# Altium PCB 2_Smoke_detector.PcbDoc (part 1 of 5)
Units mil, origin at the board's own origin, x right, y up, seen from the top; angles counter-clockwise.
Board outline 3800 x 3790 mil, 4 copper layers (Top Layer, Layer 1, Layer 2, Bottom Layer), stack 23.756 mil thick; 122 components, 70 nets, 333 pads, 0 vias.
Unrouted connection lines stored in the file: 251.
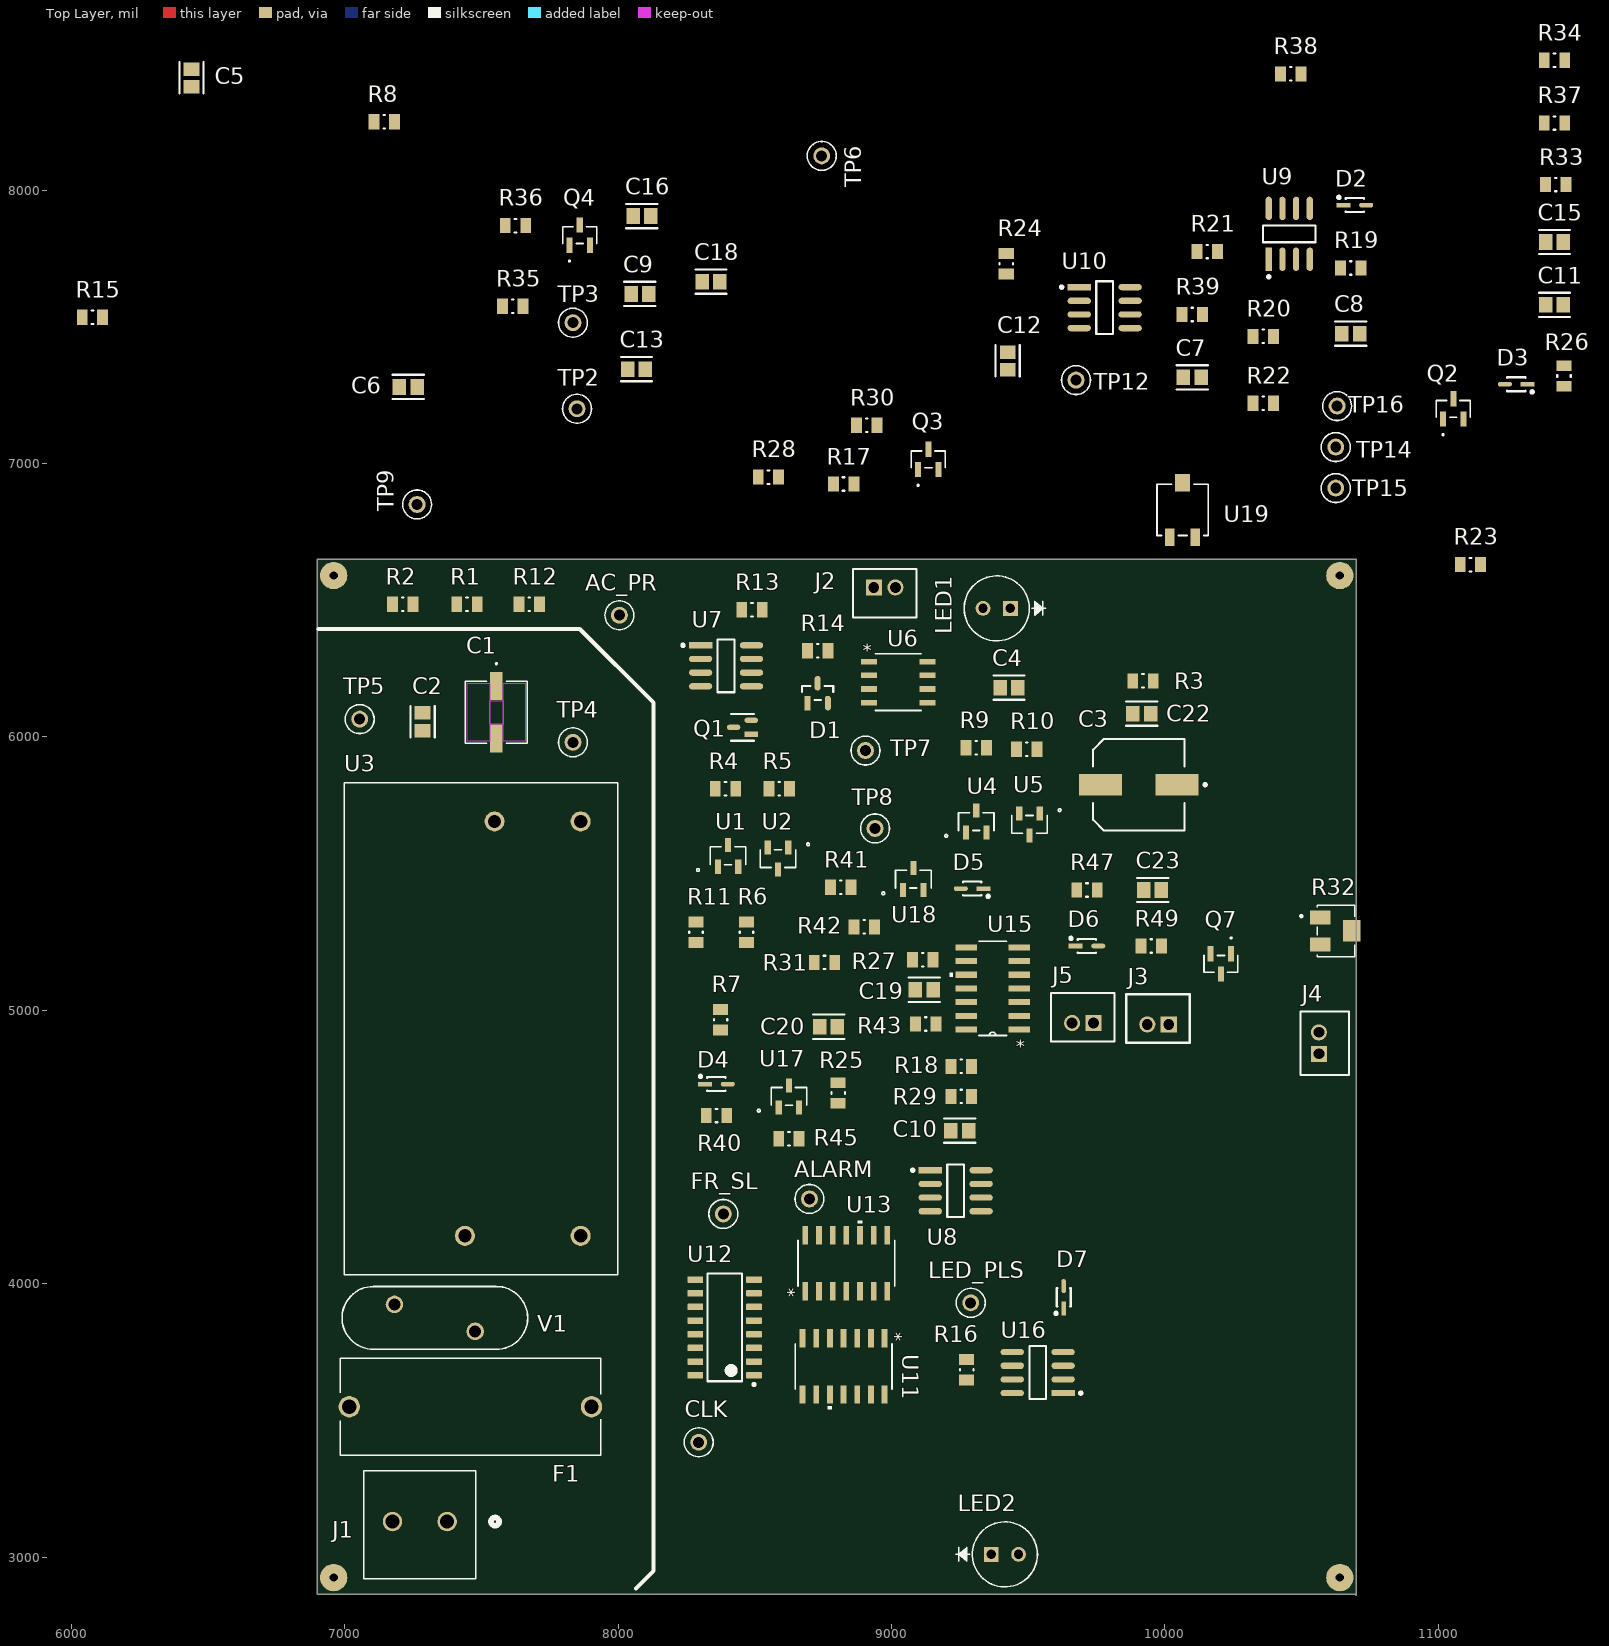
[diagram p0: Top Layer view]
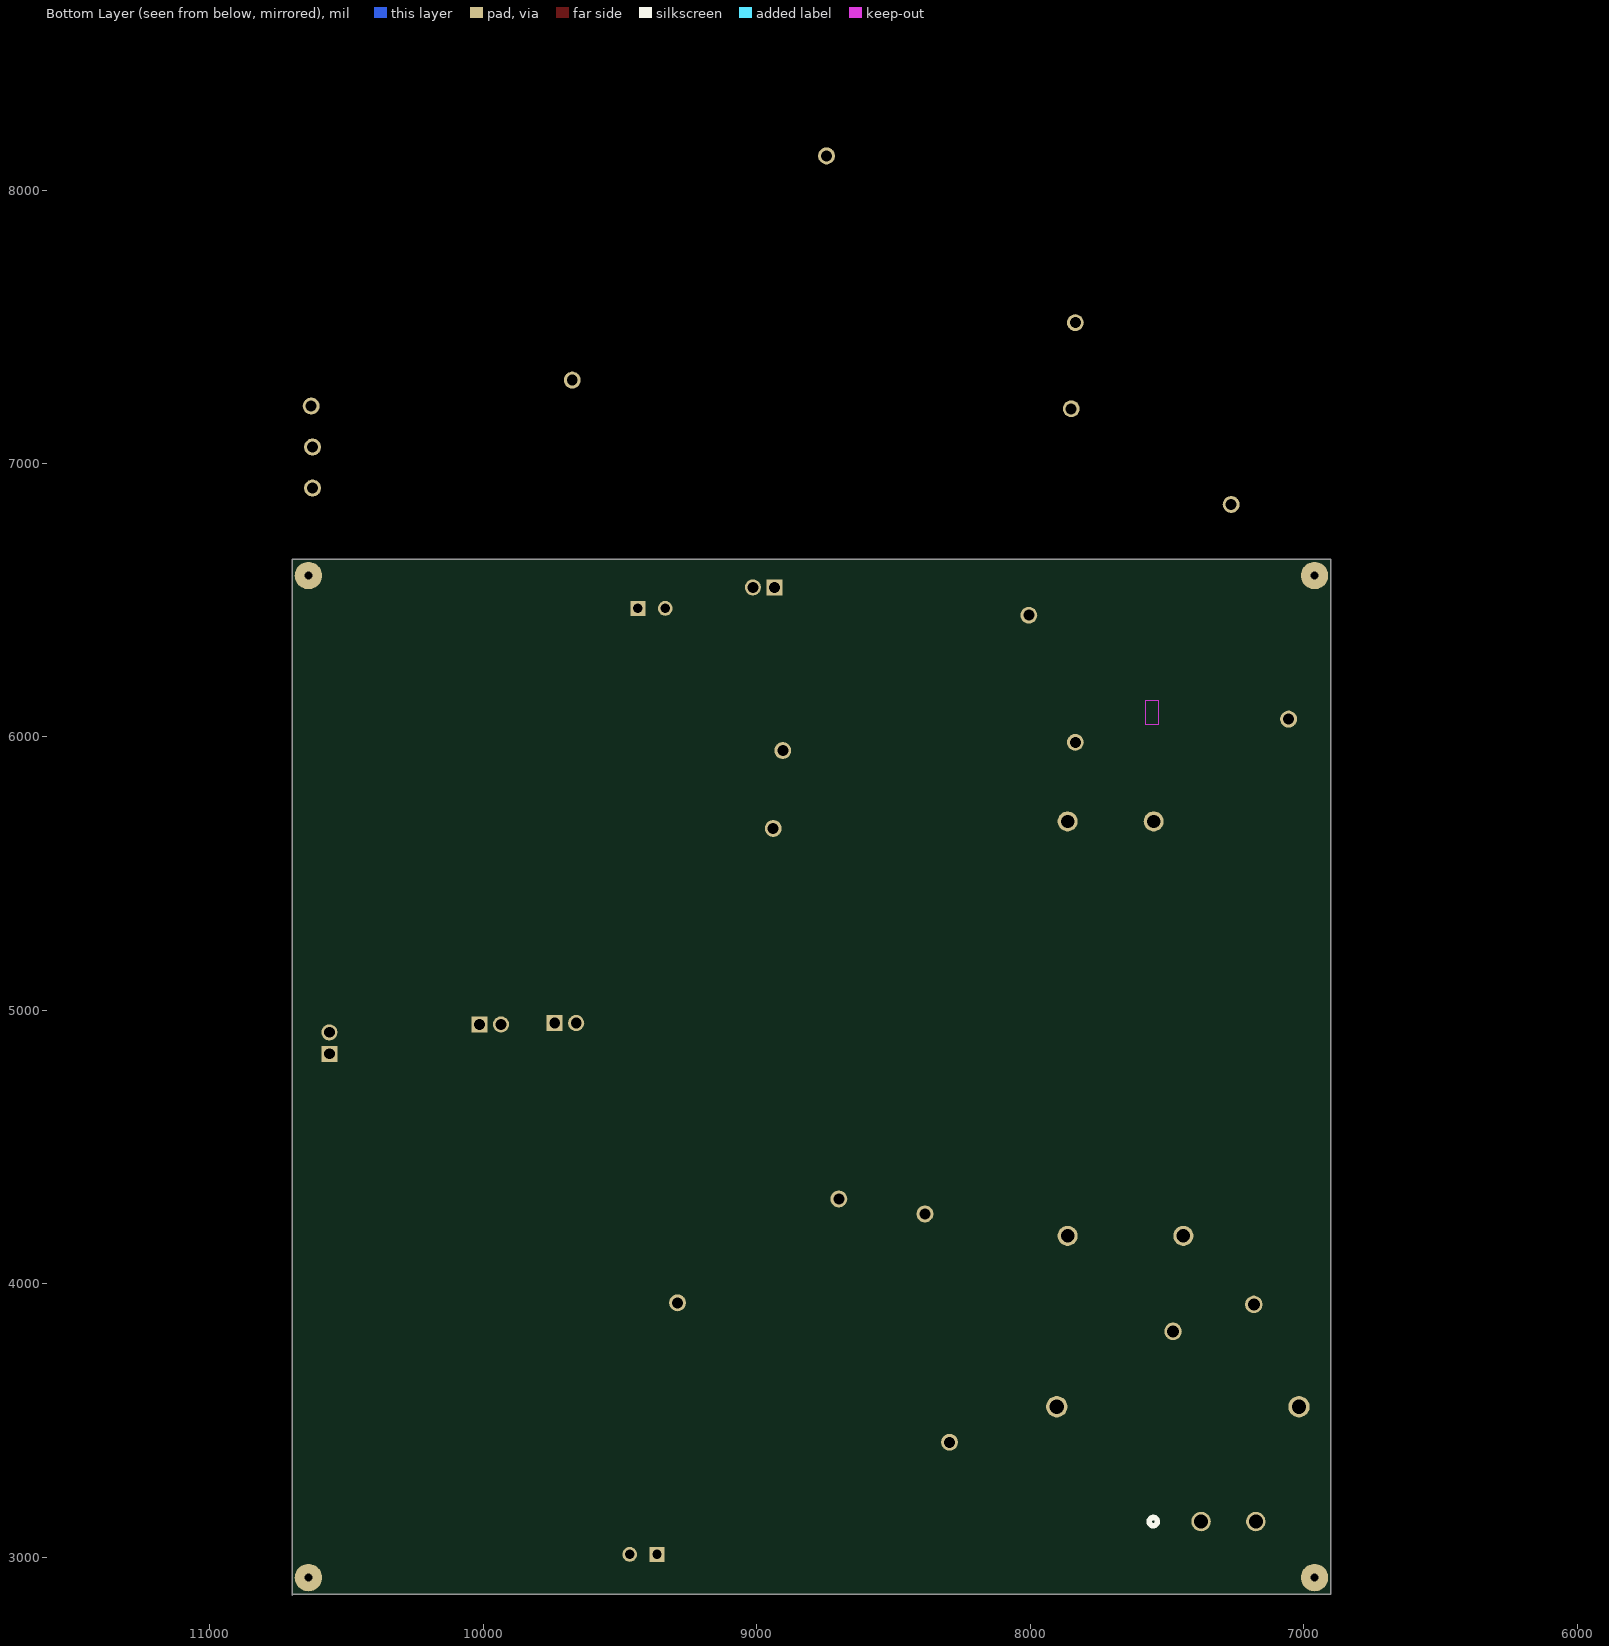
[diagram p1: Bottom Layer view, seen from below]

## Layer stack, top to bottom
Top Solder: solder mask 0.4, Solder Resist, Dk 3.5
Top Layer: signal copper 1.4
Dielectric 2: prepreg 2.8, PP-006, Dk 4.1
Layer 1: signal copper 1.378
Dielectric 1: dielectric 12.6, FR-4, Dk 4.8
Layer 2: signal copper 1.378
Dielectric 3: prepreg 2.8, PP-006, Dk 4.1
Bottom Layer: signal copper 1.4
Bottom Solder: solder mask 0.4, Solder Resist, Dk 3.5

## Board outline
6900,2865 10695,2865 10700,2860 10700,6650 6900,6650

## Design rules (kind name [scope] priority, off if disabled: settings)
BoardOutlineClearance [All] p1: gap=12 ignorepadtopadclearanceinfootprint=FALSE
Clearance [All] p1: gap=5 ignorepadtopadclearanceinfootprint=FALSE
HoleSize [All] p1: absolutevalues=TRUE maxlimit=100 minlimit=12 maxpercent=80.000 minpercent=20.000
PolygonConnect [All] p1: connectstyle=Relief reliefconductorwidth=10 reliefentries=4 polygonreliefangle="90 Angle" airgapwidth=10
RoutingVias [All] p1: holewidth=28 width=50 viastyle="Through Hole" minholewidth=12 minwidth=24 maxholewidth=28 maxwidth=50
SilkToSolderMaskClearance [IsPad] p1: minsilkscreentomaskgap=6 clearancetoexposedcopper=TRUE
SolderMaskExpansion [All] p1: expansion=2 istentingtop=FALSE
SupplyNets "Schematic Supply Nets" [InNet('GND')] p1: voltage=0.000
Width [All] p1: maxlimit=10 minlimit=5 preferedwidth=10
28 further rules are at their usual default settings.

## Components (designator, comment, footprint, x,y, rotation, side; value= is the part's Value field where it differs from the comment)
AC_PR "Test Point" FP-5004-MFG 8005,6445 r0 top (schematic designator TP11)
ALARM "Test Point" FP-5004-MFG 8700,4310 r90 top (schematic designator TP17)
C1 "100u" CAP_100u 7555,6090 r270 top
C2 "0.1u" 0805_CER_CAP 7285,6055 r90 top
C3 "470u" Radial_SMD_CAP 9905,5825 r180 top value=470µF
C4 "0.22u" 0805_CER_CAP 9430,6180 r0 top value=220nF
C5 "47u" 0805_CER_CAP 6440,8410 r270 top value=47µF
C6 "47u" 0805_CER_CAP 7232.51,7280 r0 top value=47µF
C7 "5pF" 0805_CER_CAP 10100,7315 r0 top
C8 "0.1u" 0805_CER_CAP 10680,7475 r0 top
C9 "1uF" 0805_CER_CAP 8080,7620 r180 top value=1µF
C10 "1uF" 0805_CER_CAP 9250,4560 r0 top value=1µF
C11 "1nF" 0805_CER_CAP 11425,7580 r0 top
C12 "100nF" 0805_CER_CAP 9425,7375 r90 top
C13 "10pF" 0805_CER_CAP 8067.51,7345 r0 top
C15 "100nF" 0805_CER_CAP 11425,7810 r0 top
C16 "100nF" 0805_CER_CAP 8087.51,7905 r180 top
C18 "100nF" 0805_CER_CAP 8340,7665 r180 top
C19 "100nF" 0805_CER_CAP 9120,5075 r0 top
C20 "10uF" 0805_CER_CAP 8770,4940 r180 top value=10µF
C22 "100nF" 0805_CER_CAP 9915,6085 r180 top
C23 "100nF" 0805_CER_CAP 9955,5440 r0 top
CLK "Test Point" FP-5004-MFG 8295,3420 r90 top (schematic designator TP13)
D1 "3V3 ZENER" FP-SOT23-IPC_B_ZENER 8730,6160 r90 top
D2 "DIODE" FP-477AB-IPC_B 10695,7945 r0 top value=4pF
D3 "DIODE" FP-477AB-IPC_B 11285,7290 r180 top value=4pF
D4 "DIODE" FP-477AB-IPC_B 8360,4730 r0 top value=4pF
D5 "DIODE" FP-477AB-IPC_B 9295,5445 r180 top value=4pF
D6 "DIODE" FP-477AB-IPC_B 9715,5235 r0 top value=4pF
D7 "DIODE" FP-477AB-IPC_B 9630,3950 r90 top value=4pF
F1 "FUSE" FUSE_4628 7460,3550 r0 top
FR_SL "Test Point" FP-5004-MFG 8385,4255 r90 top (schematic designator TP10)
J1 "CONN" CONN_1715721_PXC 7375,3130 r180 top
J2 "B2B-PH-K-S(LF)(SN)" JST 8975,6525 r0 top
J3 "B2B-PH-K-S(LF)(SN)" JST 9975,4970 r180 top
J4 "B2B-PH-K-S(LF)(SN)" JST 10585,4880 r90 top
J5 "B2B-PH-K-S(LF)(SN)" JST 9700,4975 r180 top
LED1 "LED YELLOW" LED_C503B-RCN-030C503B-ACN-030_CRW 9435,6470 r180 top
LED2 "LED RED" LED_C503B-RCN-030C503B-ACN-030_CRW 9365,3010 r0 top
LED_PLS "Test Point" FP-5004-MFG 9290,3930 r0 top (schematic designator TP1)
Q1 "NPN" FP-SOT323-IPC_B 8455,6035 r180 top
Q2 "N-MOSFET" SOT23_TOS 11055,7200 r0 top
Q3 "N-MOSFET" SOT23_TOS 9135,7015 r0 top
Q4 "N-MOSFET" SOT23_TOS 7860,7835 r0 top
Q7 "N-MOSFET" SOT23_TOS 10205,5170 r180 top
R1 "28.7kΩ" 0805_RES 7447.44,6485 r180 top
R2 "10kΩ" 0805_RES 7212.44,6485 r180 top
R3 "100kΩ" 0805_RES 9920,6205 r180 top
R4 "100kΩ" 0805_RES 8392.86,5810.39 r0 top
R5 "100kΩ" 0805_RES 8590,5810 r0 top
R6 "330kΩ" 0805_RES 8470,5285 r270 top
R7 "100kΩ" 0805_RES 8375,4965 r270 top
R8 "1kΩ" 0805_RES 7145,8250 r0 top
R9 "1kΩ" 0805_RES 9310,5960 r0 top
R10 "100kΩ" 0805_RES 9495,5955 r180 top
R11 "10kΩ" 0805_RES 8285,5285 r90 top
R12 "10MΩ" 0805_RES 7675,6485 r180 top
R13 "2.7kΩ" 0805_RES 8490,6465 r180 top
R14 "100kΩ" 0805_RES 8730,6315 r0 top
R15 "62kΩ" 0805_RES 6077.56,7535 r0 top
R16 "10kΩ" 0805_RES 9275,3685 r90 top
R17 "33Ω" 0805_RES 8825,6925 r180 top
R18 "4.7kΩ" 0805_RES 9255,4795 r180 top
R19 "100Ω" 0805_RES 10680,7715 r0 top
R20 "10kΩ" 0805_RES 10360,7465 r0 top
R21 "499kΩ" 0805_RES 10155,7775 r0 top
R22 "10kΩ" 0805_RES 10360,7220 r0 top
R23 "1MΩ" 0805_RES 11117.56,6630 r0 top
R24 "10kΩ" 0805_RES 9420,7730 r90 top
R25 "220kΩ" 0805_RES 8805,4697.44 r270 top
R26 "22kΩ" 0805_RES 11460,7320 r90 top
R27 "10kΩ" 0805_RES 9115,5185 r0 top
R28 "10Ω" 0805_RES 8550,6950 r0 top
R29 "1.2kΩ" 0805_RES 9255,4685 r0 top
R30 "1.2kΩ" 0805_RES 8910,7140 r0 top
R31 "10kΩ" 0805_RES 8755,5175 r0 top
R32 "3224W1103E" TRIM_3224W1103E 10626.14,5290.49 r0 top
R33 "10kΩ" 0805_RES 11430,8020 r0 top
R34 "8.2kΩ" 0805_RES 11425,8475 r0 top
R35 "100Ω" 0805_RES 7615,7575 r180 top
R36 "1MΩ" 0805_RES 7625,7870 r180 top
R37 "10kΩ" 0805_RES 11425,8245 r0 top
R38 "470Ω" 0805_RES 10460,8425 r0 top
R39 "10MΩ" 0805_RES 10100,7545 r0 top
R40 "1kΩ" 0805_RES 8360,4615 r0 top
R41 "100Ω" 0805_RES 8815,5450 r180 top
R42 "1MΩ" 0805_RES 8900,5305 r0 top
R43 "1MΩ" 0805_RES 9125,4950 r0 top
R45 "1MΩ" 0805_RES 8625,4530 r180 top
R47 "1kΩ" 0805_RES 9715,5440 r0 top
R49 "1MΩ" 0805_RES 9950,5235 r180 top
TP2 "Test Point" FP-5004-MFG 7850,7200 r0 top
TP3 "Test Point" FP-5004-MFG 7835,7515 r0 top
TP4 "Test Point" FP-5004-MFG 7835,5980 r0 top
TP5 "Test Point" FP-5004-MFG 7055,6065 r0 top
TP6 "Test Point" FP-5004-MFG 8745,8125 r0 top
TP7 "Test Point" FP-5004-MFG 8905,5950 r0 top
TP8 "Test Point" FP-5004-MFG 8940,5665 r0 top
TP9 "Test Point" FP-5004-MFG 7265,6850 r0 top
TP12 "Test Point" FP-5004-MFG 9675,7305 r90 top
TP14 "Test Point" FP-5004-MFG 10625,7060 r90 top
TP15 "Test Point" FP-5004-MFG 10625,6910 r90 top
TP16 "Test Point" FP-5004-MFG 10630,7210 r90 top
U1 "SI2301CDS-T1-GE3" TO-236_VIS 8402.4,5565 r0 top
U2 "SI2301CDS-T1-GE3" TO-236_VIS 8585,5555 r180 top
U3 "AC/DC CONVERTER" CONV_IRM-05-5 7499.06,4932.87 r90 top
U4 "SI2301CDS-T1-GE3" TO-236_VIS 9310,5690 r0 top
U5 "SI2301CDS-T1-GE3" TO-236_VIS 9505,5680 r180 top
U6 "REG" SO-8_S_LIT 9025,6200 r0 top
U7 "OP AMP" IC_TLV9062_8_SOIC 8395,6260 r0 top
U8 "OP AMP" IC_TLV9062_8_SOIC 9235,4340 r0 top
U9 "OP AMP" IC_TLV9062_8_SOIC 10455,7840 r90 top
U10 "OP AMP" IC_TLV9062_8_SOIC 9780,7570 r0 top
U11 "XOR GATE" SOT108-1_NXP 8825,3697.5 r270 top
U12 "COUNTER" D0016A_N 8390,3840 r180 top
U13 "NOR GATE" SOT108-1_NXP 8835,4075 r90 top
U15 "TLC555" D14 9370,5080 r180 top
U16 "OP AMP" IC_TLV9062_8_SOIC 9535,3675 r180 top
U17 "SI2301CDS-T1-GE3" TO-236_VIS 8625,4685 r0 top
U18 "SI2301CDS-T1-GE3" TO-236_VIS 9080,5480 r0 top
U19 "3314G-1-503E" 3314G_BRN-M 10065,6830 r0 top
V1 "Varistor" LA_14MM_LOW_LTF 7330,3875 r0 top

## Footprints (in the part's own frame and the unit in brackets; to place one, negate y for a bottom-side part, rotate by r counter-clockwise, add the part's x,y. Pads: shape width x height; smd on the part's side, far side on the other; paste and mask are expansions set on the pad)
0805_CER_CAP [mil] "0805 CER CAP"
  rect 49.4x57.33 smd paste+0 mask+0: 1(-32.51,0) 2(32.51,0)
  silkscreen extent -57,-44 57,44, body extent -67,-39 67,39, height 10
0805_RES [mil]
  rect 39.63x55.44 smd paste+0 mask+0: 1(-37.44,0) 2(37.44,0)
  silkscreen extent -3,-25 3,25, body extent -67,-38 67,38, height 10
3314G_BRN-M [mil]
  rect 35x65 smd paste+0 mask+0: 1(46.5,-99.5) 3(-46.5,-99.5)
  rect 55x65 smd paste+0 mask+0: 2(0,99.5)
  silkscreen extent -94,-94 94,94, body extent -98,-122 98,122, height 105
CAP_100u [mil] "EEE-FT1C101AR"
  rect 102.75x45.75 smd paste+0 mask+0: 1(-96.31,0) 2(96.31,0)
  Top Layer keep-out region: -42.94,-24.87 -42.94,24.87 42.94,24.87 42.94,-24.87
  Top Layer keep-out region: -106.5,24.87 -106.5,106.5 106.5,106.5 106.5,24.87
  Top Layer keep-out region: -106.5,-106.5 -106.5,-24.87 106.5,-24.87 106.5,-106.5
  Keep-Out Layer region: -42.94,-24.87 -42.94,24.87 42.94,24.87 42.94,-24.87
  silkscreen extent -181,-114 114,114, body extent -128,-109 128,109, height 242
CONN_1715721_PXC [mil]
  round 71 / inner round 60 / far side round 71 hole 51 paste-99999 mask+0: 1(0,0) 2(200,0)
  silkscreen extent -190,-186 305,210, body extent -125,-184 297,204, height 559
CONV_IRM-05-5 [mm]
  round 1.86 hole 1.24: AC/L(-19.25,-9.25) AC/N(-19.25,1.5) VNEG(19.25,-9.25) VPOS(19.25,-1.25)
  silkscreen extent -22.85,-12.7 22.85,12.7, body extent -22.73,-12.95 22.97,12.45, height 20.51
D14 [mil]
  rect 78x22 smd paste-39 mask-39: 1(-97,150) 2(-97,100) 3(-97,50) 4(-97,0) 5(-97,-50) 6(-97,-100) 7(-97,-150) 8(97,-150) 9(97,-100) 10(97,-50) 11(97,0) 12(97,50) 13(97,100) 14(97,150)
  silkscreen extent -51,-172 156,172, body extent -122,-172 122,172, height 69
D0016A_N [mm] "SOIC, 16-Leads, Body 10x4mm, Pitch 1.27mm, IPC Medium Density"
  rrect17% 1.45x0.6 smd: 1(-2.725,4.445) 2(-2.725,3.175) 3(-2.725,1.905) 4(-2.725,0.635) 5(-2.725,-0.635) 6(-2.725,-1.905) 7(-2.725,-3.175) 8(-2.725,-4.445) 9(2.725,-4.445) 10(2.725,-3.175) 11(2.725,-1.905) 12(2.725,-0.635) 13(2.725,0.635) 14(2.725,1.905) 15(2.725,3.175) 16(2.725,4.445)
  silkscreen extent -2.85,-5 1.6,5.42, body extent -3,-4.95 3,4.95, height 1.59
FP-477AB-IPC_B [mil]
  rect 51.4x17.03 smd paste+0 mask+0: 1(-41.35,0)
  rrect100% 51.4x17.03 smd paste+0 mask+0: 2(41.35,0)
  silkscreen extent -63,-26 33,33, body extent -77,-34 77,34, height 10
FP-5004-MFG [mm]
  round 1.57 hole 1.02 paste-2539.97 mask+0: 1(0,0)
  silkscreen extent -1.35,-1.34 1.35,1.34, body extent -1.45,-1.45 1.45,1.45, height 0.25
FP-SOT23-IPC_B_ZENER [mm]
  rect 1.355x0.562 smd paste+0 mask+0: 1(-0.925,0.95)
  rrect100% 1.355x0.562 smd paste+0 mask+0: 2(-0.925,-0.95) 3(0.925,0)
  silkscreen extent -0.65,-1.45 0.65,1.45, body extent -1.85,-1.7 1.85,1.7, height 0.25
FP-SOT323-IPC_B [mm]
  rect 1.259x0.482 smd paste+0 mask+0: 1(-0.827,0.65)
  rrect100% 1.259x0.482 smd paste+0 mask+0: 2(-0.827,-0.65) 3(0.827,0)
  silkscreen extent -1.05,-1.25 1.05,1.25, body extent -1.71,-1.25 1.71,1.25, height 0.25
FUSE_4628 [mm]
  round 1.98 hole 1.32: 1(-11.25,0) 2(11.25,0)
  silkscreen extent -12.1,-4.49 12.1,4.49, body extent -12.1,-4.5 12.1,4.5, height 11.99
IC_TLV9062_8_SOIC [mil]
  rect 85.4x22.92 smd paste+0 mask+0: 1(-93.06,75)
  rrect100% 85.4x22.92 smd paste+0 mask+0: 2(-93.06,25) 3(-93.06,-25) 4(-93.06,-75) 5(93.06,-75) 6(93.06,-25) 7(93.06,25) 8(93.06,75)
  silkscreen extent -162,-97 31,97, body extent -146,-106 146,106, height 10
JST [mm] "Connector, 2-Leads, Body 5.9x4.5mm, Pitch 2mm"
  rect 1.5x1.5 hole 1: 1(-1,0.55)
  round 1.5 hole 1: 2(1,0.55)
  silkscreen extent -2.95,-2.25 2.95,2.25, body extent -2.95,-2.25 2.95,2.25, height 6
LA_14MM_LOW_LTF [mil] "Varistor_MOV"
  round 64 / inner round 60 / far side round 64 hole 44 paste-99999 mask+0: 1(-147.64,49.21) 2(147.64,-49.21)
  silkscreen extent -339,-115 340,115, body extent -334,-107 334,90, height 732
LED_C503B-RCN-030C503B-ACN-030_CRW [mil]
  rect 54x54 / inner round 60 / far side rect 54x54 hole 34 paste-99999 mask+0: 1(0,0)
  round 54 / inner round 60 / far side round 54 hole 34 paste-99999 mask+0: 2(100,0)
  silkscreen extent -129,-119 169,119, body extent -64,-114 164,114, height 399
Radial_SMD_CAP [mm]
  rect 4x2 smd paste+0 mask+0: 1(-3.55,0) 2(3.55,0)
  silkscreen extent -6.28,-4.25 4.25,4.25, body extent -5.8,-4.5 5.8,4.5, height 0.25
SO-8_S_LIT [mil]
  rect 57.28x20.97 smd paste+0 mask+0: 1(-107.14,75) 2(-107.14,25) 3(-107.14,-25) 4(-107.14,-75) 5(107.14,-75) 6(107.14,-25) 7(107.14,25) 8(107.14,75)
  silkscreen extent -84,-104 84,104, body extent -122,-99 122,99, height 69
SOT23_TOS [mil]
  rect 22.36x55.56 smd paste+0 mask+0: 1(-37.4,-37) 2(37.4,-37) 3(0,37)
  silkscreen extent -62,-98 62,30, body extent -57,-51 57,51, height 43
SOT108-1_NXP [mil]
  rect 67x21 smd paste+0 mask+0: 1(-102.5,150) 2(-102.5,100) 3(-102.5,50) 4(-102.5,0) 5(-102.5,-50) 6(-102.5,-100) 7(-102.5,-150) 8(102.5,-150) 9(102.5,-100) 10(102.5,-50) 11(102.5,0) 12(102.5,50) 13(102.5,100) 14(102.5,150)
  silkscreen extent -84,-177 156,177, body extent -122,-172 122,172, height 69
TO-236_VIS [mil] "SOT23_Si2301CDS"
  rect 22.36x51.56 smd paste+0 mask+0: 1(-37.4,-40) 2(37.4,-40) 3(0,40)
  silkscreen extent -115,-57 65,32, body extent -60,-52 60,52, height 44
TRIM_3224W1103E [mm]
  rect 1.9x1.3 smd: 1(-1.45,1.25) 3(-1.45,-1.25)
  rect 1.6x2 smd: 2(1.45,0)
  silkscreen extent -3.32,-2.4 1.75,2.4, body extent -1.95,-2.4 1.95,2.4, height 5.3

## Part data
AC_PR ALARM CLK FR_SL LED_PLS TP2 TP3 TP4 TP5 TP6 TP7 TP8 TP9 TP12 TP14 TP15 TP16: library part 5004, "PCB TEST POINT", LCSC Part Number=C2906762, Manufacturer=Keystone, Automotive=No, Category=Conn, ComponentLink2Description=Datasheet, ComponentLink2URL=https://www.keyelco.com/product-pdf.cfm?p=1313, Contact Material=Silver, Device Class L1=Connectors, Device Class L2=unset, Device Class L3=unset, Digikey Description="PC TEST POINT MINIATURE YELLOW", Height=4.72mm, Is Female=yes, Lead Free=Yes, Manufacturer Part Number=5004, Mouser Description="TEST POINT PC MINI .040\"D YELLOW", Number of Contacts=1, Octopart=https://octopart.com/5004-keystone-28591, Package=5004, RoHS=TRUE
C1: library part EEEFT1C101AR, "CAP ALUM 100uF 20% 16V SMD", Capacitance=100uF, Case/Package=Radial, ESR (Equivalent Series Resistance)=360mR, LCSC Part Number=C336792, Leakage Current=16uA, Max Operating Temperature=105°C, Min Operating Temperature=-55°C, Package Quantity=1000, Ripple Current=240mA, Tolerance=20%, Voltage=16V, Construction=Cylindrical, Contact Plating=Tin, Diameter=5mm, Height=5.8mm, Height - Seated (Max)=0.24inch, Lead Diameter=0.65mm, Lead Pitch=1.5mm, Length=5.8mm, Life (Hours)=2000Hour, Mount="Surface Mount", Packaging="Tape and Reel", Radiation Hardening=No, REACH SVHC="No SVHC", Ripple Current (AC)=240mA, RoHS Compliant=Yes, Series=FT, Termination=SMD/SMT, Voltage Rating=16V, Voltage Rating (DC)=16V
C2 C8: library part CL21B104KBCNNNC, "CAP CER 0.1uF 50V X7R 0805", Capacitance=100nF, Case Code (Imperial)=0805, Case Code (Metric)=2012, Dielectric=X7R, LCSC Part Number=C1711, Max Operating Temperature=125°C, Min Operating Temperature=-55°C, Tolerance=10%, Voltage=50V, Case/Package=0805, Contact Plating=Tin, Depth=1.25mm, Height=0.85mm, Lead Free="Lead Free", Length=2mm, Material=Ceramic, Mount="Surface Mount", Packaging="Tape and Reel", Radiation Hardening=No, Thickness=0.037inch, Voltage Rating=50V, Voltage Rating (DC)=50V, Width=0.049inch
C3: library part EEEFK1A471P, "CAP ALUM 470uF ±20% 10V SMD", Case/Package=3333, Dielectric Material=Aluminium, ESR (Equivalent Series Resistance)=160mΩ, LCSC Part Number=C178530, Leakage Current=47µA, Manufacturer=Panasonic, Manufacturer Lifecycle Status=ACTIVE, Max Operating Temperature=105°C, Min Operating Temperature=-55°C, Ratings=AEC-Q200, Ripple Current=600mA, Supplier Part Number=EEE-FK1A471P, Tolerance=20%, Voltage=10V, Category="Aluminum Electrolytic Capacitors", ComponentLink1Description=https://datasheet.octopart.com:443/EEEFK1A471P-Panasonic-datasheet-169278531.pdf?src-supplier=IHS, ComponentLink1URL=https://datasheet.octopart.com:443/EEEFK1A471P-Panasonic-datasheet-169278531.pdf?src-supplier=IHS, ComponentLink2Description=https://datasheet.octopart.com:443/EEEFK1A471P-Panasonic-datasheet-62287436.pdf?src-supplier=Future+Electronics, ComponentLink2URL=https://datasheet.octopart.com:443/EEEFK1A471P-Panasonic-datasheet-62287436.pdf?src-supplier=Future+Electronics, ComponentLink3Description=https://datasheet.octopart.com:443/EEEFK1A471P-Panasonic-datasheet-8854493.pdf?src-supplier=Future+Electronics, ComponentLink3URL=https://datasheet.octopart.com:443/EEEFK1A471P-Panasonic-datasheet-8854493.pdf?src-supplier=Future+Electronics, ComponentLink4Description=https://datasheet.octopart.com:443/EEEFK1A471P-Panasonic-datasheet-8711795.pdf?src-supplier=Future+Electronics, ComponentLink4URL=https://datasheet.octopart.com:443/EEEFK1A471P-Panasonic-datasheet-8711795.pdf?src-supplier=Future+Electronics, ComponentLink5Description=https://datasheet.octopart.com:443/EEEFK1A471P-Panasonic-datasheet-5313801.pdf?src-supplier=Future+Electronics, ComponentLink5URL=https://datasheet.octopart.com:443/EEEFK1A471P-Panasonic-datasheet-5313801.pdf?src-supplier=Future+Electronics, ComponentLink6Description=https://datasheet.octopart.com:443/EEEFK1A471P-Panasonic-datasheet-61627622.pdf?src-supplier=Newark, ComponentLink6URL=https://datasheet.octopart.com:443/EEEFK1A471P-Panasonic-datasheet-61627622.pdf?src-supplier=Newark, ComponentLink7Description=https://datasheet.octopart.com:443/EEEFK1A471P-Panasonic-datasheet-8161.pdf?src-supplier=Newark, ComponentLink7URL=https://datasheet.octopart.com:443/EEEFK1A471P-Panasonic-datasheet-8161.pdf?src-supplier=Newark, ComponentLink8Description=https://datasheet.octopart.com:443/EEEFK1A471P-Panasonic-datasheet-8852369.pdf?src-supplier=Newark, ComponentLink8URL=https://datasheet.octopart.com:443/EEEFK1A471P-Panasonic-datasheet-8852369.pdf?src-supplier=Newark, ComponentLink9Description=https://datasheet.octopart.com:443/EEEFK1A471P-Panasonic-datasheet-8712906.pdf?src-supplier=Newark, ComponentLink9URL=https://datasheet.octopart.com:443/EEEFK1A471P-Panasonic-datasheet-8712906.pdf?src-supplier=Newark, ComponentLink10Description=https://datasheet.octopart.com:443/EEEFK1A471P-Panasonic-datasheet-13278598.pdf?src-supplier=Newark, ComponentLink10URL=https://datasheet.octopart.com:443/EEEFK1A471P-Panasonic-datasheet-13278598.pdf?src-supplier=Newark, ComponentLink11Description=https://datasheet.octopart.com:443/EEE-FK1A471P-Panasonic-datasheet-159140467.pdf?src-supplier=Newark, ComponentLink11URL=https://datasheet.octopart.com:443/EEE-FK1A471P-Panasonic-datasheet-159140467.pdf?src-supplier=Newark, ComponentLink12Description=https://datasheet.octopart.com:443/EEE-FK1A471P-Panasonic-datasheet-22087609.pdf?src-supplier=Newark, ComponentLink12URL=https://datasheet.octopart.com:443/EEE-FK1A471P-Panasonic-datasheet-22087609.pdf?src-supplier=Newark, ComponentLink13Description=https://datasheet.octopart.com:443/EEE-FK1A471P-Panasonic-datasheet-150469824.pdf?src-supplier=JRH+Electronics, ComponentLink13URL=https://datasheet.octopart.com:443/EEE-FK1A471P-Panasonic-datasheet-150469824.pdf?src-supplier=JRH+Electronics, ComponentLink14Description=https://datasheet.octopart.com:443/EEEFK1A471P-Panasonic-datasheet-13266987.pdf?src-supplier=RS+(Formerly+Allied+Electronics), ComponentLink14URL=https://datasheet.octopart.com:443/EEEFK1A471P-Panasonic-datasheet-13266987.pdf?src-supplier=RS+(Formerly+Allied+Electronics), ComponentLink15Description=https://datasheet.octopart.com:443/EEE-FK1A471P-Panasonic-datasheet-11546739.pdf?src-supplier=Electro+Sonic, ComponentLink15URL=https://datasheet.octopart.com:443/EEE-FK1A471P-Panasonic-datasheet-11546739.pdf?src-supplier=Electro+Sonic, ComponentLink16Description=https://sigma.octopart.com:443/150570760/technical_drawing/Panasonic-EEEFK1A471P.pdf?src-supplier=Panasonic+SCT, ComponentLink16URL=https://sigma.octopart.com:443/150570760/technical_drawing/Panasonic-EEEFK1A471P.pdf?src-supplier=Panasonic+SCT, ComponentLink17Description=https://datasheet.octopart.com:443/EEEFK1A471P-Panasonic-datasheet-136531309.pdf?src-supplier=TME, ComponentLink17URL=https://datasheet.octopart.com:443/EEEFK1A471P-Panasonic-datasheet-136531309.pdf?src-supplier=TME, ComponentLink18Description=https://datasheet.octopart.com:443/EEEFK1A471P-Panasonic-datasheet-136348055.pdf?src-supplier=TME, ComponentLink18URL=https://datasheet.octopart.com:443/EEEFK1A471P-Panasonic-datasheet-136348055.pdf?src-supplier=TME, ComponentLink19Description=https://datasheet.octopart.com:443/EEEFK1A471P-Panasonic-datasheet-7555708.pdf?src-supplier=Farnell, ComponentLink19URL=https://datasheet.octopart.com:443/EEEFK1A471P-Panasonic-datasheet-7555708.pdf?src-supplier=Farnell, ComponentLink20Description=https://datasheet.octopart.com:443/EEEFK1A471P-Panasonic-datasheet-5318435.pdf?src-supplier=Farnell, ComponentLink20URL=https://datasheet.octopart.com:443/EEEFK1A471P-Panasonic-datasheet-5318435.pdf?src-supplier=Farnell, ComponentLink21Description=https://datasheet.octopart.com:443/EEEFK1A471P-Panasonic-datasheet-5316599.pdf?src-supplier=Farnell, ComponentLink21URL=https://datasheet.octopart.com:443/EEEFK1A471P-Panasonic-datasheet-5316599.pdf?src-supplier=Farnell, ComponentLink22Description=https://datasheet.octopart.com:443/EEEFK1A471P-Panasonic-datasheet-5390910.pdf?src-supplier=Farnell, ComponentLink22URL=https://datasheet.octopart.com:443/EEEFK1A471P-Panasonic-datasheet-5390910.pdf?src-supplier=Farnell, ComponentLink23Description=https://datasheet.octopart.com:443/EEEFK1A471P-Panasonic-datasheet-7550061.pdf?src-supplier=Farnell, ComponentLink23URL=https://datasheet.octopart.com:443/EEEFK1A471P-Panasonic-datasheet-7550061.pdf?src-supplier=Farnell, ComponentLink24Description=https://datasheet.octopart.com:443/EEEFK1A471P-Panasonic-datasheet-1770.pdf?src-supplier=Farnell, ComponentLink24URL=https://datasheet.octopart.com:443/EEEFK1A471P-Panasonic-datasheet-1770.pdf?src-supplier=Farnell, ComponentLink25Description=https://datasheet.octopart.com:443/EEEFK1A471P-Panasonic-datasheet-1290.pdf?src-supplier=Farnell, ComponentLink25URL=https://datasheet.octopart.com:443/EEEFK1A471P-Panasonic-datasheet-1290.pdf?src-supplier=Farnell, ComponentLink26Description=https://datasheet.octopart.com:443/EEEFK1A471P-Panasonic-datasheet-2601.pdf?src-supplier=Farnell, ComponentLink26URL=https://datasheet.octopart.com:443/EEEFK1A471P-Panasonic-datasheet-2601.pdf?src-supplier=Farnell, ComponentLink27Description=https://datasheet.octopart.com:443/EEEFK1A471P-Panasonic-datasheet-122249.pdf?src-supplier=Farnell, ComponentLink27URL=https://datasheet.octopart.com:443/EEEFK1A471P-Panasonic-datasheet-122249.pdf?src-supplier=Farnell, ComponentLink28Description=https://datasheet.octopart.com:443/EEEFK1A471P-Panasonic-datasheet-4056.pdf?src-supplier=Farnell, ComponentLink28URL=https://datasheet.octopart.com:443/EEEFK1A471P-Panasonic-datasheet-4056.pdf?src-supplier=Farnell, Country of Origin="Japan, Malaysia", Diameter=8mm, Dissipation Factor=19%, Export Control Classification Number (ECCN) Code=EAR99, Harmonized Tariff Schedule (HTS) Code=8532.22.00.20, Height=10.2mm, Height - Seated (Max)=10.2108mm, Impedance=160mΩ, Introduction Date=2004-08-25, Lead Free="Lead Free", Length=10.2mm, Life (Hours)=2000hours, Lifecycle Status=Production, Manufacturer Part Number=EEEFK1A471P, Mounting Technology="Surface Mount", Number of Terminals=2, Packaging="Cut Tape", Part Series=FK, Pins=2, Pricing="500=0.28647, 1000=0.27558, 2000=0.26534, 4000=0.25696, 8000=0.24826 (USD)", Radiation Hardening=No, REACH SVHC=Unaffected, Ripple Current (AC)=600mA, RoHS=Compliant, Schedule B="8532220020, 8532220020|8532220020|8532220020|8532220020|8532220020", Stock=4000, Supplier=Avnet, Termination=SMD/SMT, Voltage Rating=10V, Voltage Rating (AC)=10V, Voltage Rating (DC)=10V, Width=8.3mm
C4: library part CC0805KRX7R6BB224, "CAP CER 0.22uF 10V X7R 0805", Case Code (Imperial)=0805, Case Code (Metric)=2012, Dielectric=X7R, Dielectric Material=Ceramic, Insulation Resistance=10GΩ, LCSC Part Number=C520019, Manufacturer="Yageo Group", Manufacturer Package Identifier=CC0805-0.85, Max Operating Temperature=125°C, Min Operating Temperature=-55°C, Supplier Part Number=311-4309-1-ND, Tolerance=10%, Voltage Rating=10V, Case/Package=0805, Category="Ceramic Capacitors", China RoHS=Compliant, ComponentLink1Description=https://datasheet.octopart.com:443/CC0805KRX7R6BB224-Yageo-datasheet-177165144.pdf?src-supplier=IHS, ComponentLink1URL=https://datasheet.octopart.com:443/CC0805KRX7R6BB224-Yageo-datasheet-177165144.pdf?src-supplier=IHS, ComponentLink2Description=https://datasheet.octopart.com:443/CC0805KRX7R6BB224-Yageo-datasheet-78855689.pdf?src-supplier=Upverter, ComponentLink2URL=https://datasheet.octopart.com:443/CC0805KRX7R6BB224-Yageo-datasheet-78855689.pdf?src-supplier=Upverter, ComponentLink3Description=https://datasheet.octopart.com/CC0805KRX7R6BB224-Yageo-datasheet-10883670.pdf, ComponentLink3URL=https://datasheet.octopart.com/CC0805KRX7R6BB224-Yageo-datasheet-10883670.pdf, ComponentLink4Description=https://datasheet.octopart.com:443/CC0805KRX7R6BB224-Yageo-Group-datasheet-184163374.pdf?src-supplier=LCSC, ComponentLink4URL=https://datasheet.octopart.com:443/CC0805KRX7R6BB224-Yageo-Group-datasheet-184163374.pdf?src-supplier=LCSC, ComponentLink5Description=https://datasheet.octopart.com:443/CC0805KRX7R6BB224-Yageo-datasheet-166511530.pdf?src-supplier=Future+Electronics, ComponentLink5URL=https://datasheet.octopart.com:443/CC0805KRX7R6BB224-Yageo-datasheet-166511530.pdf?src-supplier=Future+Electronics, ComponentLink6Description=https://datasheet.octopart.com:443/CC0805KRX7R6BB224-Yageo-datasheet-137700082.pdf?src-supplier=Future+Electronics, ComponentLink6URL=https://datasheet.octopart.com:443/CC0805KRX7R6BB224-Yageo-datasheet-137700082.pdf?src-supplier=Future+Electronics, ComponentLink7Description=https://datasheet.octopart.com:443/CC0805KRX7R6BB224-Yageo-datasheet-137700084.pdf?src-supplier=Future+Electronics, ComponentLink7URL=https://datasheet.octopart.com:443/CC0805KRX7R6BB224-Yageo-datasheet-137700084.pdf?src-supplier=Future+Electronics, ComponentLink8Description=https://datasheet.octopart.com:443/CC0805KRX7R6BB224-Yageo-datasheet-27626582.pdf?src-supplier=Future+Electronics, ComponentLink8URL=https://datasheet.octopart.com:443/CC0805KRX7R6BB224-Yageo-datasheet-27626582.pdf?src-supplier=Future+Electronics, ComponentLink9Description=https://datasheet.octopart.com:443/CC0805KRX7R6BB224-Yageo-datasheet-15895757.pdf?src-supplier=Future+Electronics, ComponentLink9URL=https://datasheet.octopart.com:443/CC0805KRX7R6BB224-Yageo-datasheet-15895757.pdf?src-supplier=Future+Electronics, ComponentLink10Description=https://datasheet.octopart.com:443/CC0805KRX7R6BB224-Yageo-datasheet-12526321.pdf?src-supplier=Future+Electronics, ComponentLink10URL=https://datasheet.octopart.com:443/CC0805KRX7R6BB224-Yageo-datasheet-12526321.pdf?src-supplier=Future+Electronics, ComponentLink11Description=https://datasheet.octopart.com:443/CC0805KRX7R6BB224-Yageo-Group-datasheet-165992755.pdf?src-supplier=ODG+(Origin+Data+Global), ComponentLink11URL=https://datasheet.octopart.com:443/CC0805KRX7R6BB224-Yageo-Group-datasheet-165992755.pdf?src-supplier=ODG+(Origin+Data+Global), ComponentLink12Description=http://sigma.octopart.com:80/conflict_mineral_statement/Yageo-company-3.pdf?src-supplier=Compliance+Statements, ComponentLink12URL=http://sigma.octopart.com:80/conflict_mineral_statement/Yageo-company-3.pdf?src-supplier=Compliance+Statements, ComponentLink13Description=http://sigma.octopart.com:80/rohs_statement/Yageo-company-2.pdf?src-supplier=Compliance+Statements, ComponentLink13URL=http://sigma.octopart.com:80/rohs_statement/Yageo-company-2.pdf?src-supplier=Compliance+Statements, Composition=Ceramic, Country of Origin="Mainland China, Taiwan", Depth=1.25mm, Dissipation Factor=5%, Export Control Classification Number (ECCN) Code=EAR99, Halogen Free="Halogen Free", Harmonized Tariff Schedule (HTS) Code=8532.24.00.20, Height=850µm, Introduction Date=2011-01-31, Lead Free="Lead Free", Length=2mm, Lifecycle Status=Production, Manufacturer Part Number=CC0805KRX7R6BB224, Material=Ceramic, Mounting Technology="Surface Mount", Number of Terminals=2, Packaging="Tape and Reel", Pricing="1=0.19, 10=0.109, 50=0.0768, 100=0.0669, 500=0.05016 (USD)", REACH SVHC=Unaffected, RoHS=Compliant, Stock=33422, Supplier=DigiKey, Termination=SMD/SMT, Thickness=939.8µm, Voltage Rating (DC)=10V, Weight=5.499807mg, Width=1.25mm
C5 C6: library part GRM21BR61A476ME15L, "CAP CER 47uF 10V X5R 0805", Case Code (Imperial)=0805, Case Code (Metric)=2012, Dielectric=X5R, Dielectric Material=Ceramic, LCSC Part Number=C124129, Manufacturer=Murata, Manufacturer Lifecycle Status="IN PRODUCTION", Max Operating Temperature=85°C, Min Operating Temperature=-55°C, Tolerance=20%, Voltage=10V, Case/Package=0805, Category="Ceramic Capacitors", ComponentLink1Description=https://datasheet.octopart.com:443/GRM21BR61A476ME15L-Murata-datasheet-22122223.pdf?src-supplier=Upverter, ComponentLink1URL=https://datasheet.octopart.com:443/GRM21BR61A476ME15L-Murata-datasheet-22122223.pdf?src-supplier=Upverter, ComponentLink2Description=https://datasheet.octopart.com:443/GRM21BR61A476ME15L-Murata-datasheet-66077109.pdf?src-supplier=element14+APAC, ComponentLink2URL=https://datasheet.octopart.com:443/GRM21BR61A476ME15L-Murata-datasheet-66077109.pdf?src-supplier=element14+APAC, ComponentLink3Description=https://datasheet.octopart.com:443/GRM21BR61A476ME15L-Murata-datasheet-141278181.pdf?src-supplier=Geoflip, ComponentLink3URL=https://datasheet.octopart.com:443/GRM21BR61A476ME15L-Murata-datasheet-141278181.pdf?src-supplier=Geoflip, ComponentLink4Description=https://datasheet.octopart.com:443/GRM21BR61A476ME15L-Murata-datasheet-165579666.pdf?src-supplier=TME, ComponentLink4URL=https://datasheet.octopart.com:443/GRM21BR61A476ME15L-Murata-datasheet-165579666.pdf?src-supplier=TME, ComponentLink5Description=https://datasheet.octopart.com:443/GRM21BR61A476ME15L-Murata-datasheet-59876780.pdf?src-supplier=TME, ComponentLink5URL=https://datasheet.octopart.com:443/GRM21BR61A476ME15L-Murata-datasheet-59876780.pdf?src-supplier=TME, ComponentLink6Description=https://datasheet.octopart.com:443/GRM21BR61A476ME15L-Murata-datasheet-140707527.pdf?src-supplier=Ciiva, ComponentLink6URL=https://datasheet.octopart.com:443/GRM21BR61A476ME15L-Murata-datasheet-140707527.pdf?src-supplier=Ciiva, ComponentLink7Description=https://datasheet.octopart.com:443/GRM21BR61A476ME15L-Murata-datasheet-138744839.pdf?src-supplier=Ciiva, ComponentLink7URL=https://datasheet.octopart.com:443/GRM21BR61A476ME15L-Murata-datasheet-138744839.pdf?src-supplier=Ciiva, ComponentLink8Description=https://datasheet.octopart.com/GRM21BR61A476ME15L-Murata-datasheet-12515295.pdf, ComponentLink8URL=https://datasheet.octopart.com/GRM21BR61A476ME15L-Murata-datasheet-12515295.pdf, ComponentLink9Description=https://datasheet.octopart.com/GRM21BR61A476ME15L-Murata-datasheet-12510076.pdf, ComponentLink9URL=https://datasheet.octopart.com/GRM21BR61A476ME15L-Murata-datasheet-12510076.pdf, ComponentLink10Description=https://datasheet.octopart.com/GRM21BR61A476ME15L-Murata-datasheet-11978611.pdf, ComponentLink10URL=https://datasheet.octopart.com/GRM21BR61A476ME15L-Murata-datasheet-11978611.pdf, ComponentLink11Description=https://datasheet.octopart.com/GRM21BR61A476ME15L-Murata-datasheet-10025737.pdf, ComponentLink11URL=https://datasheet.octopart.com/GRM21BR61A476ME15L-Murata-datasheet-10025737.pdf, ComponentLink12Description=https://datasheet.octopart.com/GRM21BR61A476ME15L-Murata-datasheet-8819587.pdf, ComponentLink12URL=https://datasheet.octopart.com/GRM21BR61A476ME15L-Murata-datasheet-8819587.pdf, ComponentLink13Description=http://sigma.octopart.com:80/reach_statement/Murata-company-16.pdf?src-supplier=Compliance+Statements, ComponentLink13URL=http://sigma.octopart.com:80/reach_statement/Murata-company-16.pdf?src-supplier=Compliance+Statements, Country of Origin=Philippines, Depth=1.25mm, Dissipation Factor=0.035%, Export Control Classification Number (ECCN) Code=EAR99, Harmonized Tariff Schedule (HTS) Code=8532.24.00.20, Height=1.25mm, Introduction Date=2013-11-20, Lead Free="Lead Free", Length=2mm, Lifecycle Status=Production, Manufacturer Part Number=GRM21BR61A476ME15L, Material=Ceramic, Mounting Technology="Surface Mount", Number of Terminals=2, Packaging="Cut Tape", Pricing="3000=0.715 (USD)", REACH SVHC=Unaffected, RoHS=Compliant, Schedule B="8532240020, 8532240020|8532240020, 8532240020|8532240020|8532240020, 8532240020|8532240020|8532240020|8532240020", Stock=548000, Supplier="Future Electronics", Supplier Part Number=GRM21BR61A476ME15L, Termination=SMD/SMT, Thickness=1.25mm, Voltage Rating=10V, Voltage Rating (DC)=10V, Width=1.25mm
C7: library part CC0805CRNPO9BN5R0, "CAP CER 5pF 50V NP0 0805", Case Code (Imperial)=0805, Case Code (Metric)=2012, Dielectric=C0G, Dielectric Material=Ceramic, LCSC Part Number=C519940, Manufacturer="Yageo Group", Max Operating Temperature=125°C, Min Operating Temperature=-55°C, Voltage Rating=50V, Case/Package=0805, Category="Ceramic Capacitors", China RoHS=Compliant, ComponentLink1Description=https://datasheet.octopart.com:443/CC0805CRNPO9BN5R0-Yageo-datasheet-137875056.pdf?src-supplier=IHS, ComponentLink1URL=https://datasheet.octopart.com:443/CC0805CRNPO9BN5R0-Yageo-datasheet-137875056.pdf?src-supplier=IHS, ComponentLink2Description=https://datasheet.octopart.com:443/CC0805CRNPO9BN5R0-Yageo-Group-datasheet-192360829.pdf?src-supplier=Future+Electronics, ComponentLink2URL=https://datasheet.octopart.com:443/CC0805CRNPO9BN5R0-Yageo-Group-datasheet-192360829.pdf?src-supplier=Future+Electronics, ComponentLink3Description=https://datasheet.octopart.com:443/CC0805CRNPO9BN5R0-Yageo-datasheet-137700082.pdf?src-supplier=Future+Electronics, ComponentLink3URL=https://datasheet.octopart.com:443/CC0805CRNPO9BN5R0-Yageo-datasheet-137700082.pdf?src-supplier=Future+Electronics, ComponentLink4Description=https://datasheet.octopart.com:443/CC0805CRNPO9BN5R0-Yageo-datasheet-78855684.pdf?src-supplier=Future+Electronics, ComponentLink4URL=https://datasheet.octopart.com:443/CC0805CRNPO9BN5R0-Yageo-datasheet-78855684.pdf?src-supplier=Future+Electronics, ComponentLink5Description=https://datasheet.octopart.com:443/CC0805CRNPO9BN5R0-Yageo-datasheet-24578986.pdf?src-supplier=Future+Electronics, ComponentLink5URL=https://datasheet.octopart.com:443/CC0805CRNPO9BN5R0-Yageo-datasheet-24578986.pdf?src-supplier=Future+Electronics, ComponentLink6Description=https://datasheet.octopart.com:443/CC0805CRNPO9BN5R0-Yageo-datasheet-16730043.pdf?src-supplier=Future+Electronics, ComponentLink6URL=https://datasheet.octopart.com:443/CC0805CRNPO9BN5R0-Yageo-datasheet-16730043.pdf?src-supplier=Future+Electronics, ComponentLink7Description=https://datasheet.octopart.com:443/CC0805CRNPO9BN5R0-Yageo-datasheet-12589826.pdf?src-supplier=Future+Electronics, ComponentLink7URL=https://datasheet.octopart.com:443/CC0805CRNPO9BN5R0-Yageo-datasheet-12589826.pdf?src-supplier=Future+Electronics, ComponentLink8Description=https://datasheet.octopart.com:443/CC0805CRNPO9BN5R0-Yageo-datasheet-182878260.pdf?src-supplier=Farnell, ComponentLink8URL=https://datasheet.octopart.com:443/CC0805CRNPO9BN5R0-Yageo-datasheet-182878260.pdf?src-supplier=Farnell, ComponentLink9Description=https://datasheet.octopart.com:443/CC0805CRNPO9BN5R0-Yageo-datasheet-151948684.pdf?src-supplier=Newark, ComponentLink9URL=https://datasheet.octopart.com:443/CC0805CRNPO9BN5R0-Yageo-datasheet-151948684.pdf?src-supplier=Newark, ComponentLink10Description=https://datasheet.octopart.com:443/CC0805CRNPO9BN5R0-Yageo-datasheet-10406438.pdf?src-supplier=_legacy+Avnet, ComponentLink10URL=https://datasheet.octopart.com:443/CC0805CRNPO9BN5R0-Yageo-datasheet-10406438.pdf?src-supplier=_legacy+Avnet, ComponentLink11Description=http://sigma.octopart.com:80/conflict_mineral_statement/Yageo-company-3.pdf?src-supplier=Compliance+Statements, ComponentLink11URL=http://sigma.octopart.com:80/conflict_mineral_statement/Yageo-company-3.pdf?src-supplier=Compliance+Statements, ComponentLink12Description=http://sigma.octopart.com:80/rohs_statement/Yageo-company-2.pdf?src-supplier=Compliance+Statements, ComponentLink12URL=http://sigma.octopart.com:80/rohs_statement/Yageo-company-2.pdf?src-supplier=Compliance+Statements, Composition=Ceramic, Depth=1.25mm, Halogen Free="Halogen Free", Lead Free="Lead Free", Length=2mm, Lifecycle Status=Production, Manufacturer Part Number=CC0805CRNPO9BN5R0, Mounting Technology="Surface Mount", Number of Terminals=2, Packaging="Tape and Reel", Pricing="4000=0.0639, 8000=0.0628, 12000=0.0622, 16000=0.0617, 20000=0.0604 (USD)", Radiation Hardening=No, REACH SVHC=Unaffected, RoHS=Compliant, Stock=16000, Supplier="Future Electronics", Supplier Part Number=CC0805CRNPO9BN5R0, Termination=SMD/SMT, Thickness=711.2µm, Voltage Rating (DC)=50V, Weight=5.499807mg, Width=1.2446mm
C9 C10: library part CL21B105KBFNNNE, "CAP CER 1uF 50V X7R 0805", Case Code (Imperial)=0805, Case Code (Metric)=2012, Dielectric=X7R, Dielectric Material=Ceramic, LCSC Part Number=C28323, Manufacturer="Samsung Electro-Mechanics", Max Operating Temperature=125°C, Min Operating Temperature=-55°C, Tolerance=10%, Voltage=50V, Case/Package=0805, Category="Ceramic Capacitors", China RoHS=Compliant, ComponentLink1Description=https://datasheet.octopart.com:443/CL21B105KBFNNNE-Samsung-Electro-Mechanics-datasheet-136482495.pdf?src-supplier=IHS, ComponentLink1URL=https://datasheet.octopart.com:443/CL21B105KBFNNNE-Samsung-Electro-Mechanics-datasheet-136482495.pdf?src-supplier=IHS, ComponentLink2Description=https://datasheet.octopart.com:443/CL21B105KBFNNNE-Samsung-Electro-Mechanics-datasheet-11733377.pdf?src-supplier=Future+Electronics, ComponentLink2URL=https://datasheet.octopart.com:443/CL21B105KBFNNNE-Samsung-Electro-Mechanics-datasheet-11733377.pdf?src-supplier=Future+Electronics, ComponentLink3Description=https://datasheet.octopart.com:443/CL21B105KBFNNNE-Samsung-Electro-Mechanics-datasheet-116891038.pdf?src-supplier=Future+Electronics, ComponentLink3URL=https://datasheet.octopart.com:443/CL21B105KBFNNNE-Samsung-Electro-Mechanics-datasheet-116891038.pdf?src-supplier=Future+Electronics, ComponentLink4Description=https://datasheet.octopart.com:443/CL21B105KBFNNNE-Samsung-Electro-Mechanics-datasheet-81462183.pdf?src-supplier=Future+Electronics, ComponentLink4URL=https://datasheet.octopart.com:443/CL21B105KBFNNNE-Samsung-Electro-Mechanics-datasheet-81462183.pdf?src-supplier=Future+Electronics, ComponentLink5Description=https://datasheet.octopart.com:443/CL21B105KBFNNNE-Samsung-datasheet-48647582.pdf?src-supplier=Future+Electronics, ComponentLink5URL=https://datasheet.octopart.com:443/CL21B105KBFNNNE-Samsung-datasheet-48647582.pdf?src-supplier=Future+Electronics, ComponentLink6Description=https://datasheet.octopart.com:443/CL21B105KBFNNNE-Samsung-datasheet-8326294.pdf?src-supplier=Future+Electronics, ComponentLink6URL=https://datasheet.octopart.com:443/CL21B105KBFNNNE-Samsung-datasheet-8326294.pdf?src-supplier=Future+Electronics, ComponentLink7Description=https://datasheet.octopart.com:443/CL21B105KBFNNNE-Samsung-Electro-Mechanics-datasheet-149045959.pdf?src-supplier=Future+Electronics, ComponentLink7URL=https://datasheet.octopart.com:443/CL21B105KBFNNNE-Samsung-Electro-Mechanics-datasheet-149045959.pdf?src-supplier=Future+Electronics, ComponentLink8Description=https://datasheet.octopart.com/CL21B105KBFNNNE-Samsung-Electro-Mechanics-datasheet-97040617.pdf, ComponentLink8URL=https://datasheet.octopart.com/CL21B105KBFNNNE-Samsung-Electro-Mechanics-datasheet-97040617.pdf, ComponentLink9Description=https://datasheet.octopart.com/CL21B105KBFNNNE-Samsung-Electro-Mechanics-datasheet-8324245.pdf, ComponentLink9URL=https://datasheet.octopart.com/CL21B105KBFNNNE-Samsung-Electro-Mechanics-datasheet-8324245.pdf, ComponentLink10Description=https://datasheet.octopart.com/General-Multilayer-Ceramic-Capacitors-Samsung-datasheet-family-111.pdf, ComponentLink10URL=https://datasheet.octopart.com/General-Multilayer-Ceramic-Capacitors-Samsung-datasheet-family-111.pdf, ComponentLink11Description=https://datasheet.octopart.com:443/CL21B105KBFNNNE-Samsung-datasheet-59220082.pdf?src-supplier=TME, ComponentLink11URL=https://datasheet.octopart.com:443/CL21B105KBFNNNE-Samsung-datasheet-59220082.pdf?src-supplier=TME, ComponentLink12Description=http://sigma.octopart.com:80/rohs_certificate/General-Multilayer-Ceramic-Capacitors-Samsung-family-110.pdf?src-supplier=Compliance+Statements, ComponentLink12URL=http://sigma.octopart.com:80/rohs_certificate/General-Multilayer-Ceramic-Capacitors-Samsung-family-110.pdf?src-supplier=Compliance+Statements, ComponentLink13Description=http://sigma.octopart.com:80/rohs_statement/General-Multilayer-Ceramic-Capacitors-Samsung-family-132.pdf?src-supplier=Compliance+Statements, ComponentLink13URL=http://sigma.octopart.com:80/rohs_statement/General-Multilayer-Ceramic-Capacitors-Samsung-family-132.pdf?src-supplier=Compliance+Statements, ComponentLink14Description=http://sigma.octopart.com:80/reach_statement/General-Multilayer-Ceramic-Capacitors-Samsung-family-133.pdf?src-supplier=Compliance+Statements, ComponentLink14URL=http://sigma.octopart.com:80/reach_statement/General-Multilayer-Ceramic-Capacitors-Samsung-family-133.pdf?src-supplier=Compliance+Statements, Country of Origin="Mainland China, Philippines, South Korea", Depth=1.25mm, Export Control Classification Number (ECCN) Code=EAR99, Harmonized Tariff Schedule (HTS) Code=8532.24.00.20, Height=1.35mm, Introduction Date=2010-07-30, Length=2mm, Lifecycle Status=Production, Manufacturer Part Number=CL21B105KBFNNNE, Material=Ceramic, Mounting Technology="Surface Mount", Number of Terminals=2, Pricing="2000=0.01628 (USD)", Radiation Hardening=No, REACH SVHC=Unaffected, RoHS=Compliant, Schedule B="8532240020, 8532240020|8532240020, 8532240020|8532240020|8532240020, 8532240020|8532240020|8532240020|8532240020", Supplier=Avnet, Supplier Part Number=CL21B105KBFNNNE, Thickness=1.3462mm, Voltage Rating=50V, Voltage Rating (DC)=50V, Width=1.25mm
C11: library part CL21B102KBCNNNC, "CAP CER 1nF 50V X7R 0805", Case Code (Imperial)=0805, Case Code (Metric)=2012, Dielectric=X7R, Dielectric Material=Ceramic, LCSC Part Number=C46653, Manufacturer="Samsung Electro-Mechanics", Max Operating Temperature=125°C, Min Operating Temperature=-55°C, Tolerance=10%, Voltage Rating=50V, Case/Package=0805, Category="Ceramic Capacitors", China RoHS=Compliant, ComponentLink1Description=https://datasheet.octopart.com:443/CL21B102KBCNNNC-Samsung-Electro-Mechanics-datasheet-136482475.pdf?src-supplier=IHS, ComponentLink1URL=https://datasheet.octopart.com:443/CL21B102KBCNNNC-Samsung-Electro-Mechanics-datasheet-136482475.pdf?src-supplier=IHS, ComponentLink2Description=https://datasheet.octopart.com:443/CL21B102KBCNNNC-Samsung-Electro-Mechanics-datasheet-116891019.pdf?src-supplier=Future+Electronics, ComponentLink2URL=https://datasheet.octopart.com:443/CL21B102KBCNNNC-Samsung-Electro-Mechanics-datasheet-116891019.pdf?src-supplier=Future+Electronics, ComponentLink3Description=https://datasheet.octopart.com:443/CL21B102KBCNNNC-Samsung-Electro-Mechanics-datasheet-81462161.pdf?src-supplier=Future+Electronics, ComponentLink3URL=https://datasheet.octopart.com:443/CL21B102KBCNNNC-Samsung-Electro-Mechanics-datasheet-81462161.pdf?src-supplier=Future+Electronics, ComponentLink4Description=https://datasheet.octopart.com:443/CL21B102KBCNNNC-Samsung-datasheet-31820677.pdf?src-supplier=Future+Electronics, ComponentLink4URL=https://datasheet.octopart.com:443/CL21B102KBCNNNC-Samsung-datasheet-31820677.pdf?src-supplier=Future+Electronics, ComponentLink5Description=https://datasheet.octopart.com:443/CL21B102KBCNNNC-Samsung-Electro-Mechanics-datasheet-149045903.pdf?src-supplier=Future+Electronics, ComponentLink5URL=https://datasheet.octopart.com:443/CL21B102KBCNNNC-Samsung-Electro-Mechanics-datasheet-149045903.pdf?src-supplier=Future+Electronics, ComponentLink6Description=https://datasheet.octopart.com:443/CL21B102KBCNNNC-Samsung-datasheet-37081328.pdf?src-supplier=Future+Electronics, ComponentLink6URL=https://datasheet.octopart.com:443/CL21B102KBCNNNC-Samsung-datasheet-37081328.pdf?src-supplier=Future+Electronics, ComponentLink7Description=https://datasheet.octopart.com/CL21B102KBCNNNC-Samsung-Electro-Mechanics-datasheet-97040617.pdf, ComponentLink7URL=https://datasheet.octopart.com/CL21B102KBCNNNC-Samsung-Electro-Mechanics-datasheet-97040617.pdf, ComponentLink8Description=https://datasheet.octopart.com/CL21B102KBCNNNC-Samsung-Electro-Mechanics-datasheet-8324245.pdf, ComponentLink8URL=https://datasheet.octopart.com/CL21B102KBCNNNC-Samsung-Electro-Mechanics-datasheet-8324245.pdf, ComponentLink9Description=https://datasheet.octopart.com/General-Multilayer-Ceramic-Capacitors-Samsung-datasheet-family-111.pdf, ComponentLink9URL=https://datasheet.octopart.com/General-Multilayer-Ceramic-Capacitors-Samsung-datasheet-family-111.pdf, ComponentLink10Description=http://sigma.octopart.com:80/rohs_certificate/General-Multilayer-Ceramic-Capacitors-Samsung-family-110.pdf?src-supplier=Compliance+Statements, ComponentLink10URL=http://sigma.octopart.com:80/rohs_certificate/General-Multilayer-Ceramic-Capacitors-Samsung-family-110.pdf?src-supplier=Compliance+Statements, ComponentLink11Description=http://sigma.octopart.com:80/rohs_statement/General-Multilayer-Ceramic-Capacitors-Samsung-family-132.pdf?src-supplier=Compliance+Statements, ComponentLink11URL=http://sigma.octopart.com:80/rohs_statement/General-Multilayer-Ceramic-Capacitors-Samsung-family-132.pdf?src-supplier=Compliance+Statements, ComponentLink12Description=http://sigma.octopart.com:80/reach_statement/General-Multilayer-Ceramic-Capacitors-Samsung-family-133.pdf?src-supplier=Compliance+Statements, ComponentLink12URL=http://sigma.octopart.com:80/reach_statement/General-Multilayer-Ceramic-Capacitors-Samsung-family-133.pdf?src-supplier=Compliance+Statements, Country of Origin="Mainland China, Philippines, South Korea", Depth=1.25mm, Export Control Classification Number (ECCN) Code=EAR99, Harmonized Tariff Schedule (HTS) Code=8532.24.00.20, Height=850µm, Introduction Date=2010-07-30, Lead Free="Lead Free", Length=2mm, Lifecycle Status=Production, Manufacturer Part Number=CL21B102KBCNNNC, Material=Ceramic, Mounting Technology="Surface Mount", Number of Terminals=2, Pricing="4000=0.0102 (USD)", Radiation Hardening=No, REACH SVHC=Unaffected, RoHS=Compliant, Schedule B="8532240020, 8532240020|8532240020|8532240020|8532240020|8532240020|8532240020|8532240020|8532240020|8532240020|8532240020|8532240020|8532240020|8532240020|8532240020|8532240020|8532240020|8532240020|8532240020|8532240020|8532240020|8532240020|8532240020|8532240020|85", Stock=428000, Supplier=Avnet, Supplier Part Number=CL21B102KBCNNNC, Thickness=939.8µm, Voltage Rating (DC)=50V, Width=1.25mm